# EAGLE board banana-split-panel (EAGLE 9.5.2), part 1 of 2
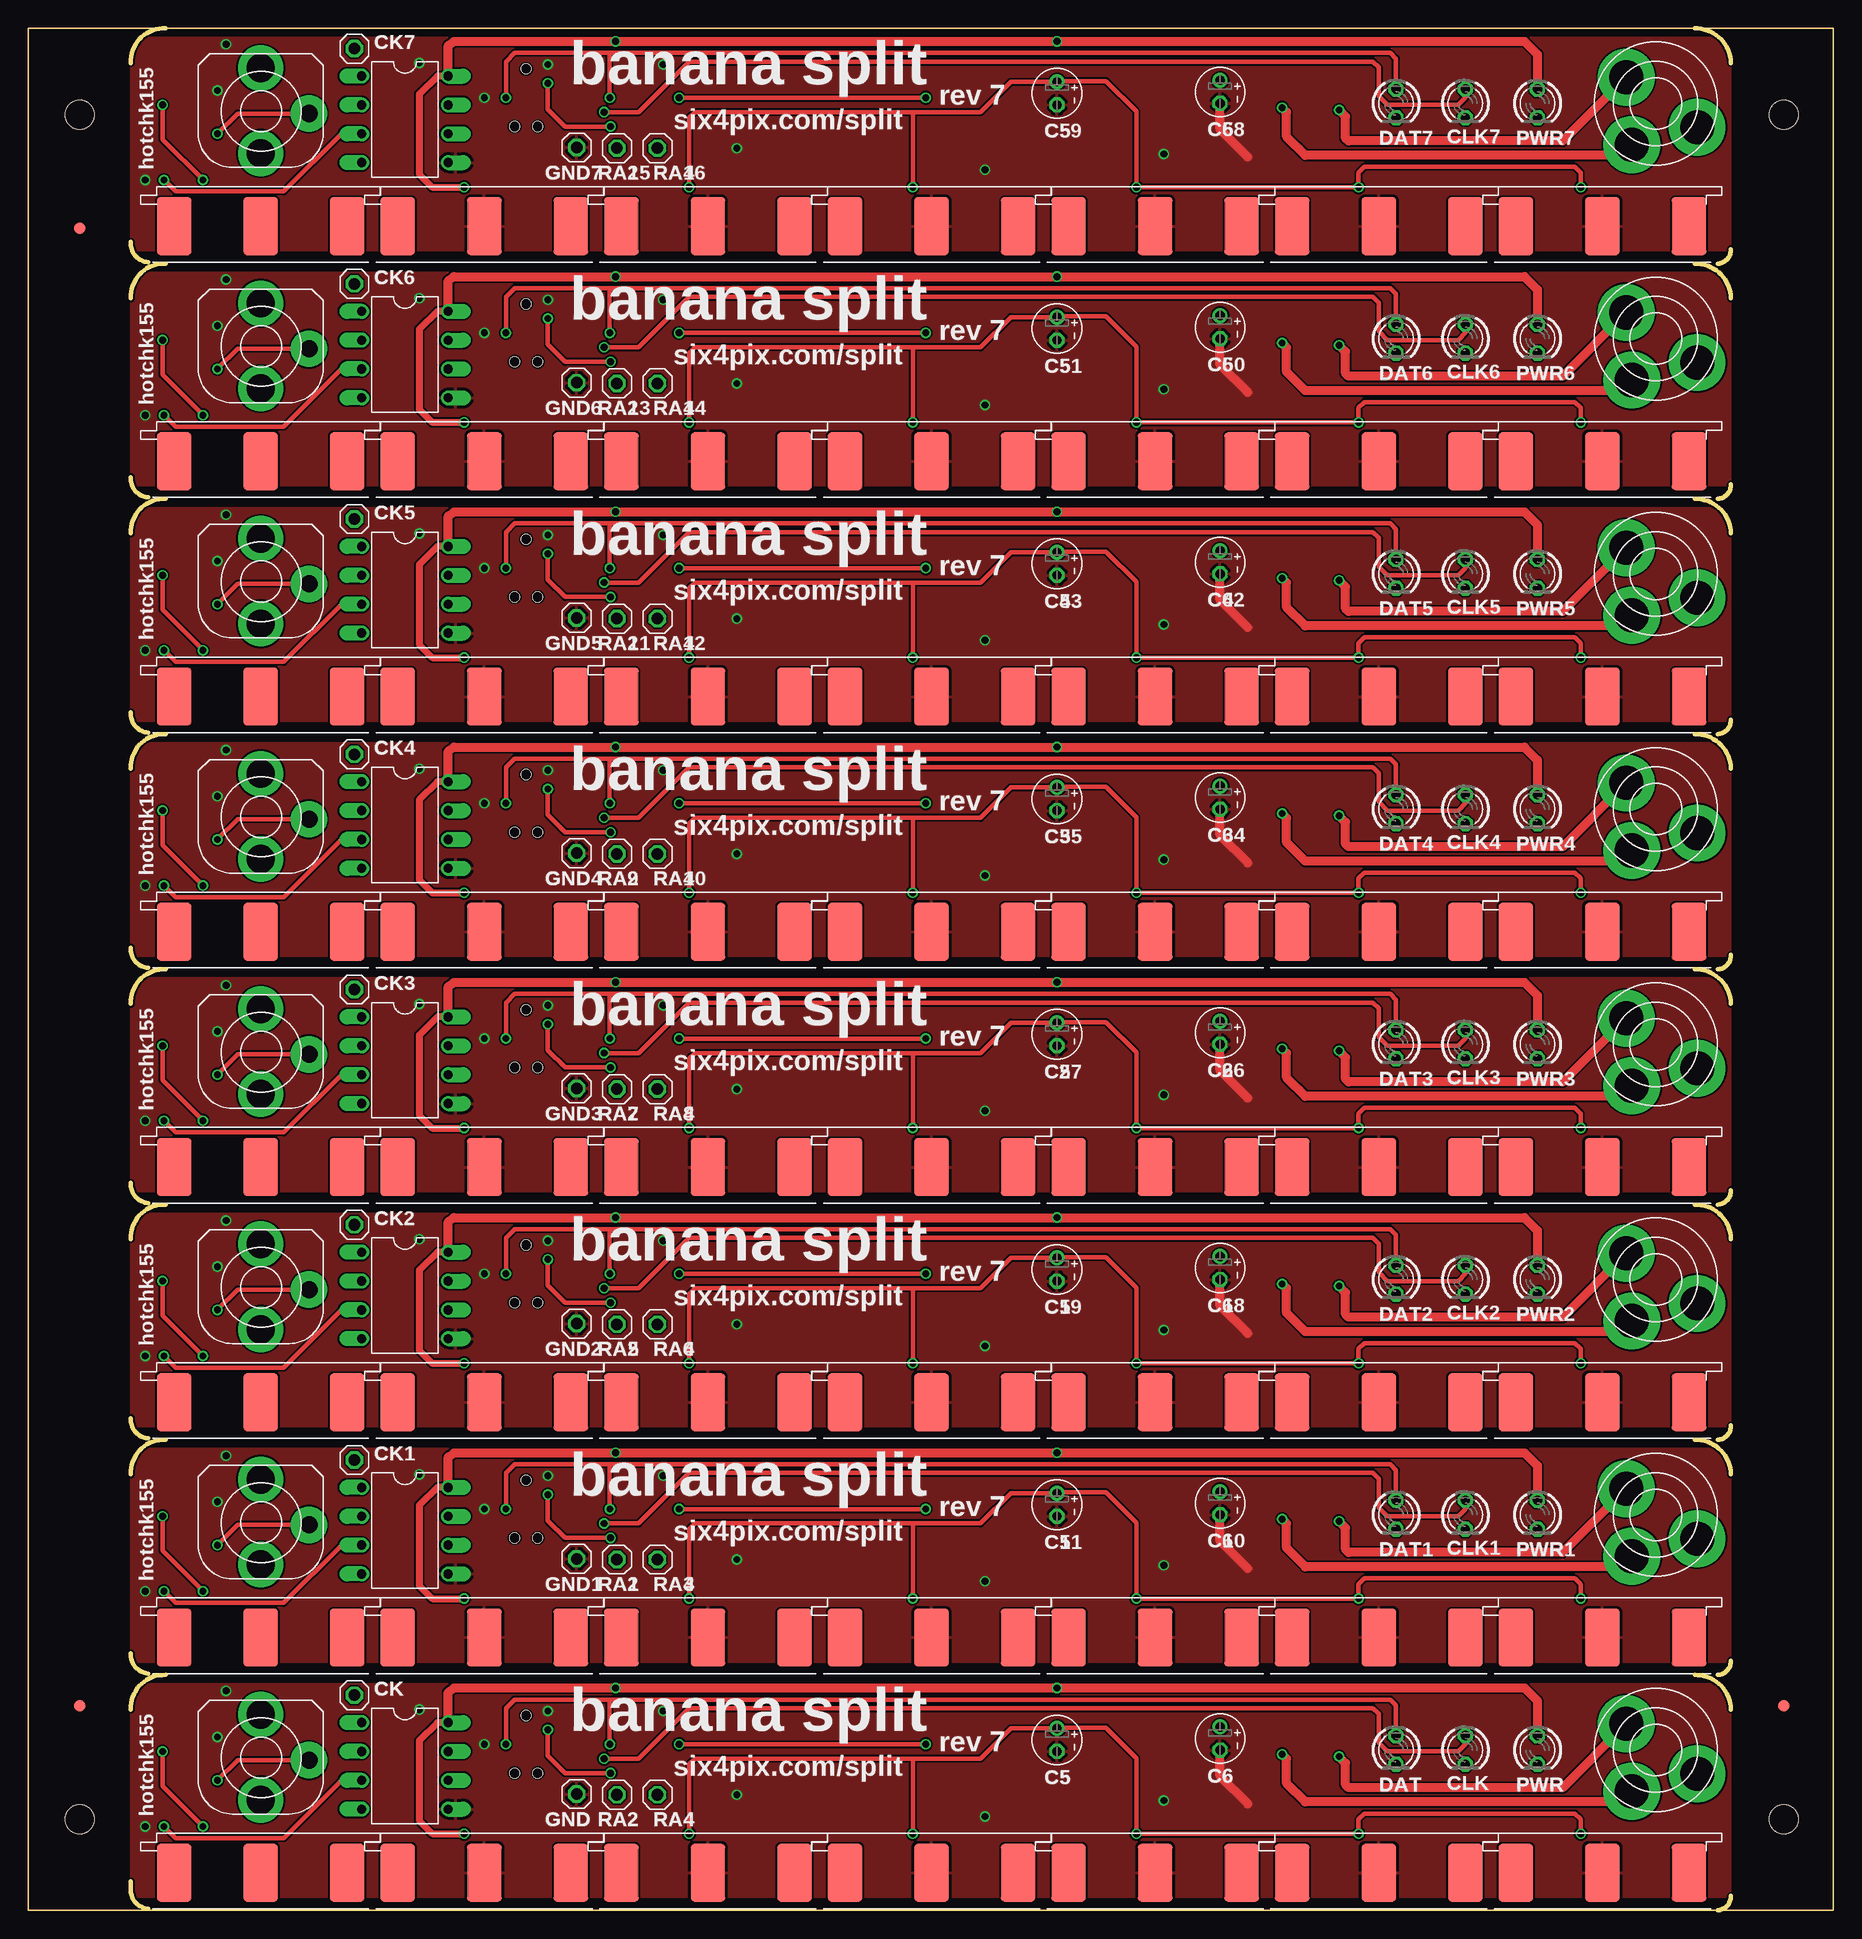
[diagram p0: board, top side]
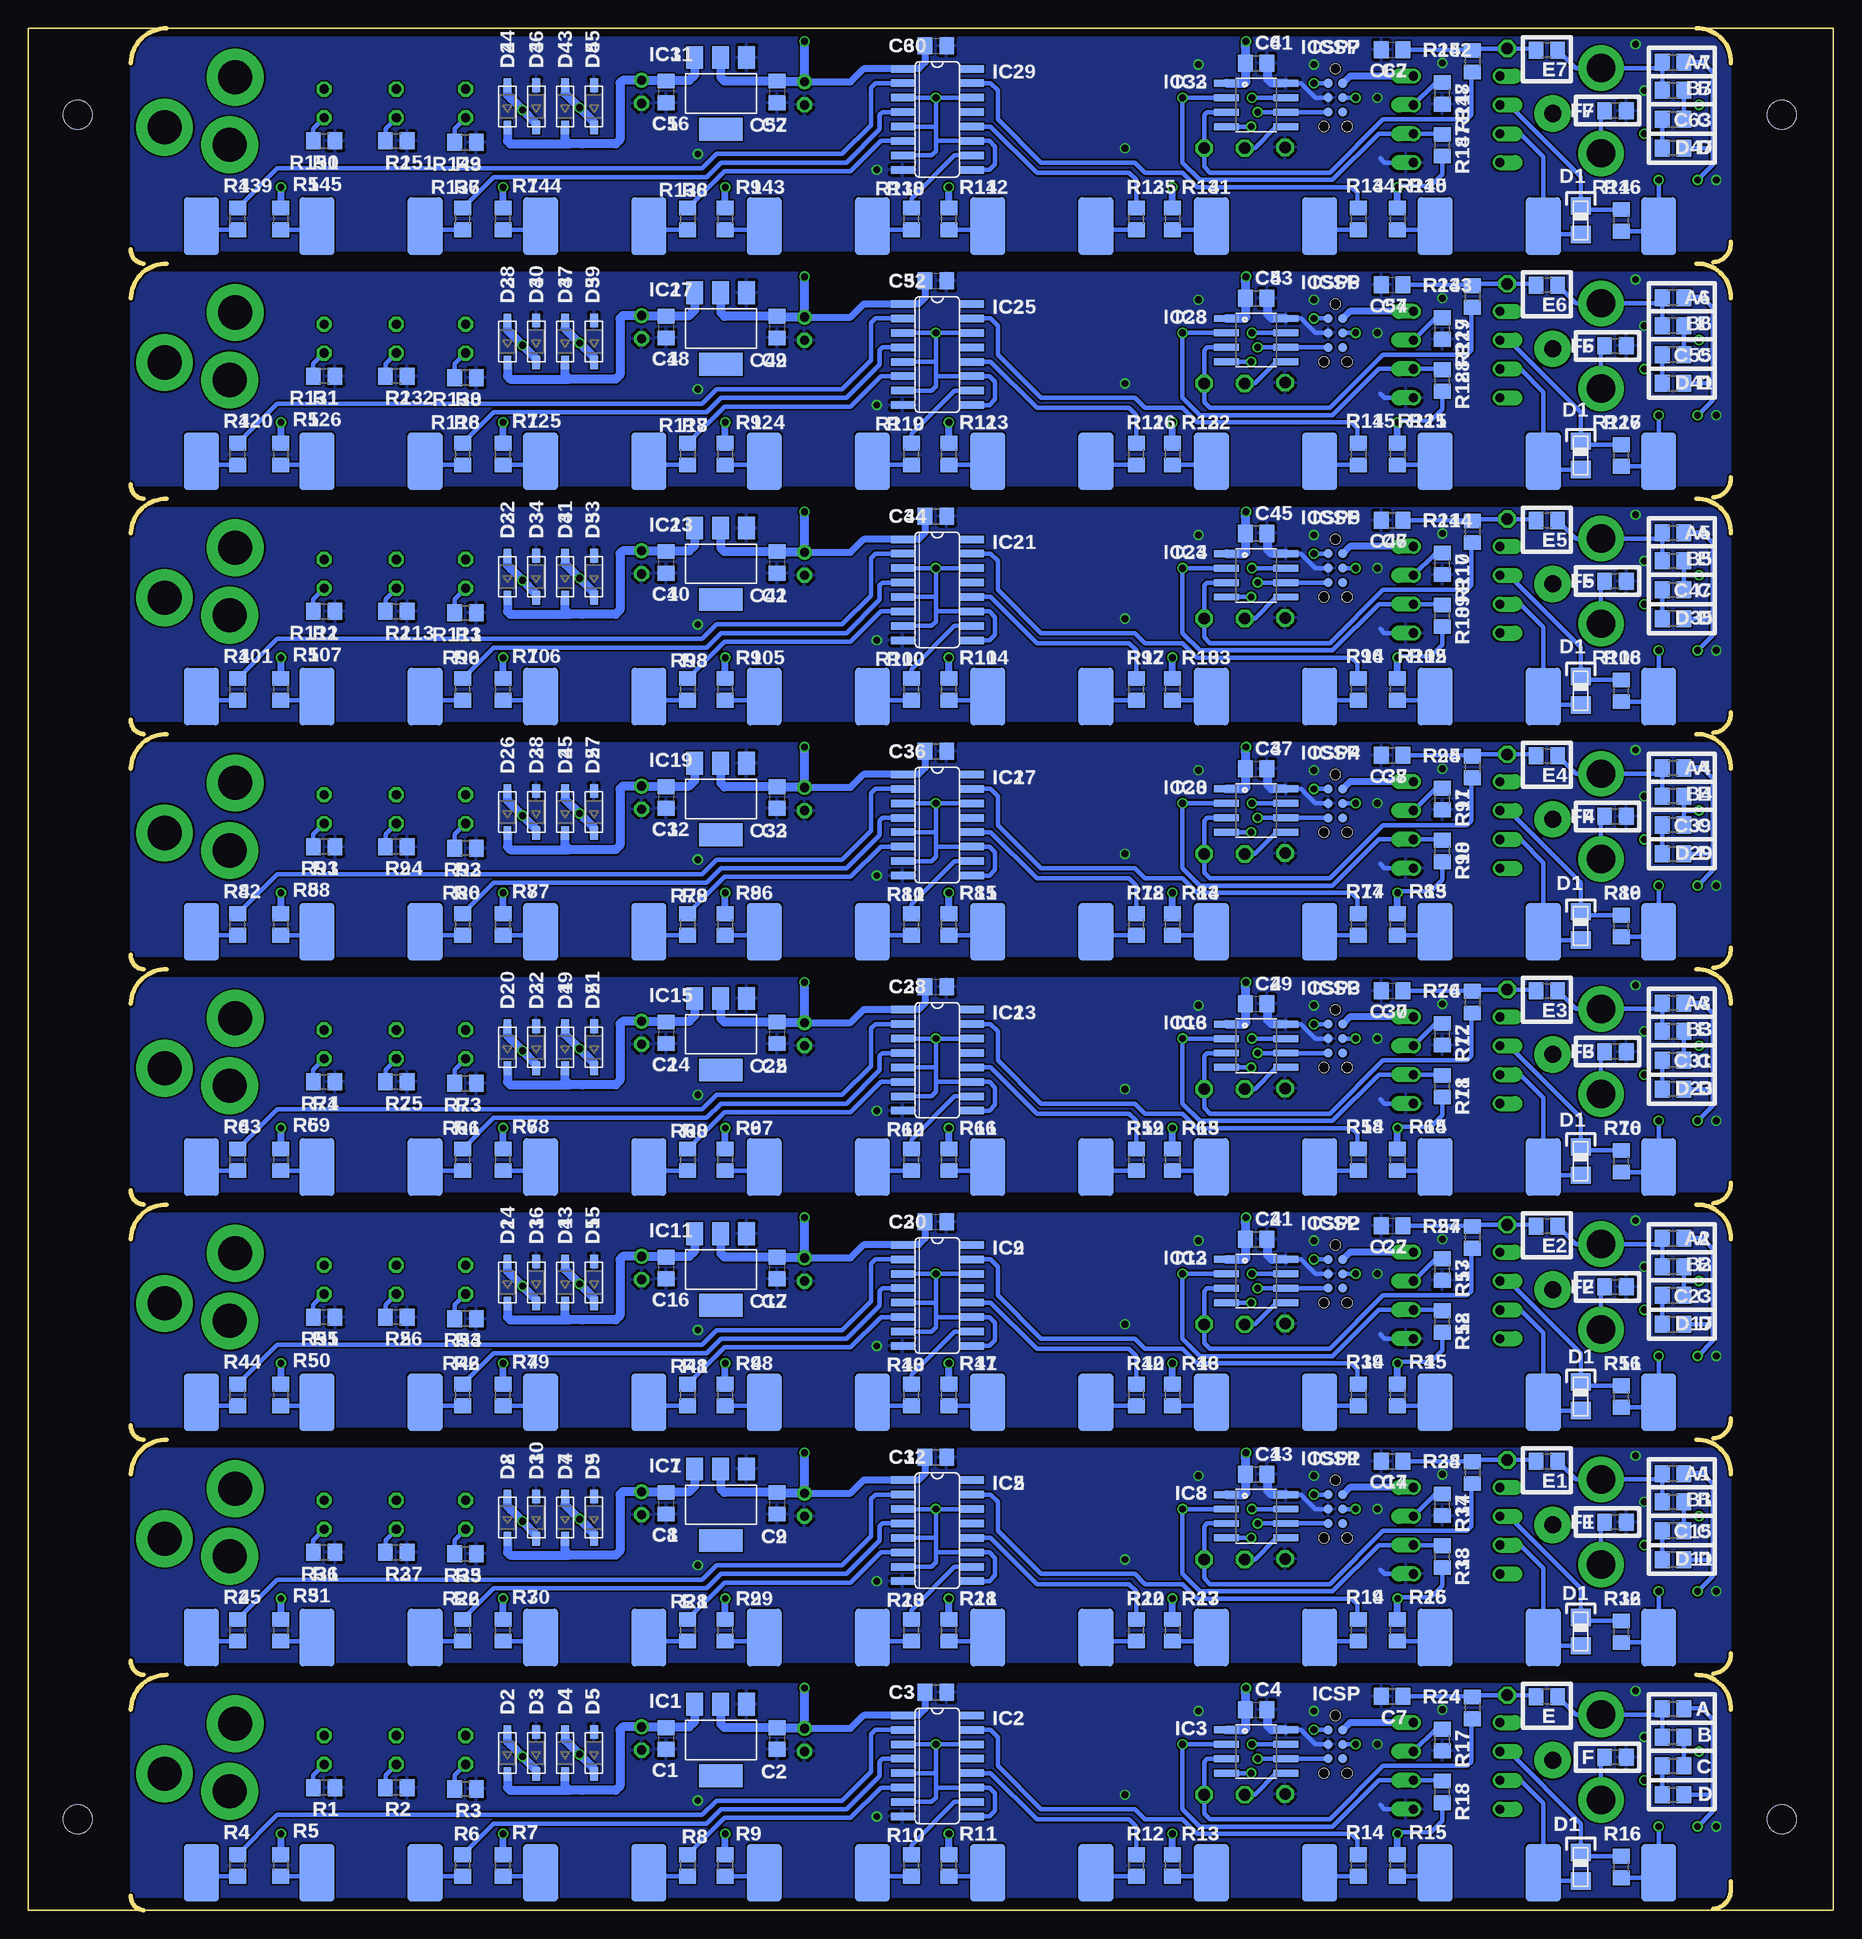
[diagram p1: board, bottom side, seen from below]

Size 158.88 x 165.61 mm. Coordinates in mm from the lower left corner, seen from the top.
Outline: 38 segments
Copper layers (1*16): Top 0.035mm / dielectric 1.5mm / Bottom 0.035mm
Design rules "hackvana": minimum track width 6mil, minimum drill 0.3mm, track to track 6mil, track to pad 9mil, pad to pad 6mil, via to via 6mil, smd to smd 0mil, copper to edge 6mil, drill to drill 6mil, minimum pad ring 10mil, minimum via ring 6mil, stop-mask expansion 2mil, vias tented up to drill 100mil, thermal gap 10mil
Holes 2.54 mm at 4.52,158 154.52,158 4.52,8 154.52,8

## Footprints (pad centres in the part's own frame; a part is rotated, then mirrored left to right if it is on the bottom)
R0805 = smd 1.3 x 1.5: 1 -0.95,0; 2 0.95,0
C0805 = smd 1.3 x 1.5: 1 -0.95,0; 2 0.95,0
E2-4 = drill 0.813 pad 1.27: + -1.016,0 | drill 0.813 pad 1.27 octagon: - 1.016,0
1X01 = drill 1.016 octagon: 1 0,0
LED3MM = drill 0.813 octagon: A -1.27,0; K 1.27,0
0805DIODE = smd 1.524 x 1.778: A -1.262,-0.005; C 1.238,-0.005
SOD-123 = smd 1.2 x 0.7: A 1.85,0; C -1.85,0
FIDUCIAL_1MM = smd 1 x 1: 1 0,0
SOT223 = smd 1.499 x 2.007: 1 -2.261,-3.15; 2 0.025,-3.15; 3 2.311,-3.15 | smd 3.81 x 2.007: 4 0,3.15
SO16 = smd 0.66 x 2.032: 1 -4.445,-3.073; 2 -3.175,-3.073; 3 -1.905,-3.073; 4 -0.635,-3.073; 5 0.635,-3.073; 6 1.905,-3.073; 7 3.175,-3.073; 8 4.445,-3.073; 9 4.445,3.073; 10 3.175,3.073; 11 1.905,3.073; 12 0.635,3.073; 13 -0.635,3.073; 14 -1.905,3.073; 15 -3.175,3.073; 16 -4.445,3.073
SO08 = smd 0.61 x 2.21: 1 -1.905,-2.616; 2 -0.635,-2.616; 3 0.635,-2.616; 4 1.905,-2.616; 5 1.905,2.616; 6 0.635,2.616; 7 -0.635,2.616; 8 -1.905,2.616
DIL08 = drill 0.813 offset: 1 -3.81,-3.81; 2 -1.27,-3.81; 3 1.27,-3.81; 4 3.81,-3.81; 5 3.81,3.81; 6 1.27,3.81; 7 -1.27,3.81; 8 -3.81,3.81
TC2030-MCP-NL = smd 0.787 x 0.787: 1 1.27,-0.635; 2 1.27,0.635; 3 2.54,-0.635; 4 2.54,0.635; 5 3.81,-0.635; 6 3.81,0.635 | hole 0.889: 0,0; 5.08,-1.016; 5.08,1.016
EDGEDIN = smd 3.048 x 5.08: 1 -7.62,-10.16; 2 0,-10.16; 3 7.62,-10.16 | smd 3.048 x 5.08 bottom: 4 -5.08,-10.16; 5 5.08,-10.16
PWR_SOCKET_2_1MM = drill 3 pad 5: BARREL 0,4.2; NC -4.2,0; PIN 3.4,-0.7
VERTICAL_3_5MM_SOCKET = drill 2.5 pad 4: 2 0,-3.75; 4 0,3.75 | drill 1.5 pad 3.2: 3 4.25,-0.25

## Placement (x,y rotation side)
A  1k8  [R0805]  14.1,17.72 180 bottom
A1  1k8  [R0805]  14.1,38.42 180 bottom
A2  1k8  [R0805]  14.1,59.12 180 bottom
A3  1k8  [R0805]  14.1,79.82 180 bottom
A4  1k8  [R0805]  14.1,100.52 180 bottom
A5  1k8  [R0805]  14.1,121.22 180 bottom
A6  1k8  [R0805]  14.1,141.92 180 bottom
A7  1k8  [R0805]  14.1,162.62 180 bottom
B  1k8  [R0805]  14.1,15.24 180 bottom
B1  1k8  [R0805]  14.1,35.94 180 bottom
B2  1k8  [R0805]  14.1,56.64 180 bottom
B3  1k8  [R0805]  14.1,77.34 180 bottom
B4  1k8  [R0805]  14.1,98.04 180 bottom
B5  1k8  [R0805]  14.1,118.75 180 bottom
B6  1k8  [R0805]  14.1,139.45 180 bottom
B7  1k8  [R0805]  14.1,160.15 180 bottom
C  1k8  [R0805]  14.1,12.7 180 bottom
C1  100n  [C0805]  102.74,15.11 270 bottom
C2  100n  [C0805]  92.96,15.11 270 bottom
C3  [C0805]  78.99,19.18 0 bottom
C4  100n  [C0805]  50.8,17.65 0 bottom
C5  4u7  [E2-4]  90.55,14.99 270 top
C6  4u7  [E2-4]  104.9,15.11 270 top
C7  100n  [C0805]  38.83,18.83 0 bottom
C8  100n  [C0805]  102.74,35.81 270 bottom
C9  100n  [C0805]  92.96,35.81 270 bottom
C10  4u7  [E2-4]  104.9,35.81 270 top
C11  4u7  [E2-4]  90.55,35.69 270 top
C12  [C0805]  78.99,39.88 0 bottom
C13  100n  [C0805]  50.8,38.35 0 bottom
C14  100n  [C0805]  38.83,39.53 0 bottom
C15  1k8  [R0805]  14.1,33.4 180 bottom
C16  100n  [C0805]  102.74,56.52 270 bottom
C17  100n  [C0805]  92.96,56.52 270 bottom
C18  4u7  [E2-4]  104.9,56.52 270 top
C19  4u7  [E2-4]  90.55,56.39 270 top
C20  [C0805]  78.99,60.58 0 bottom
C21  100n  [C0805]  50.8,59.05 0 bottom
C22  100n  [C0805]  38.83,60.23 0 bottom
C23  1k8  [R0805]  14.1,54.1 180 bottom
C24  100n  [C0805]  102.74,77.22 270 bottom
C25  100n  [C0805]  92.96,77.22 270 bottom
C26  4u7  [E2-4]  104.9,77.22 270 top
C27  4u7  [E2-4]  90.55,77.09 270 top
C28  [C0805]  78.99,81.28 0 bottom
C29  100n  [C0805]  50.8,79.76 0 bottom
C30  100n  [C0805]  38.83,80.93 0 bottom
C31  1k8  [R0805]  14.1,74.8 180 bottom
C32  100n  [C0805]  102.74,97.92 270 bottom
C33  100n  [C0805]  92.96,97.92 270 bottom
C34  4u7  [E2-4]  104.9,97.92 270 top
C35  4u7  [E2-4]  90.55,97.79 270 top
C36  [C0805]  78.99,101.98 0 bottom
C37  100n  [C0805]  50.8,100.46 0 bottom
C38  100n  [C0805]  38.83,101.63 0 bottom
C39  1k8  [R0805]  14.1,95.5 180 bottom
C40  100n  [C0805]  102.74,118.62 270 bottom
C41  100n  [C0805]  92.96,118.62 270 bottom
C42  4u7  [E2-4]  104.9,118.62 270 top
C43  4u7  [E2-4]  90.55,118.49 270 top
C44  [C0805]  78.99,122.68 0 bottom
C45  100n  [C0805]  50.8,121.16 0 bottom
C46  100n  [C0805]  38.83,122.33 0 bottom
C47  1k8  [R0805]  14.1,116.2 180 bottom
C48  100n  [C0805]  102.74,139.32 270 bottom
C49  100n  [C0805]  92.96,139.32 270 bottom
C50  4u7  [E2-4]  104.9,139.32 270 top
C51  4u7  [E2-4]  90.55,139.19 270 top
C52  [C0805]  78.99,143.38 0 bottom
C53  100n  [C0805]  50.8,141.86 0 bottom
C54  100n  [C0805]  38.83,143.03 0 bottom
C55  1k8  [R0805]  14.1,136.91 180 bottom
C56  100n  [C0805]  102.74,160.02 270 bottom
C57  100n  [C0805]  92.96,160.02 270 bottom
C58  4u7  [E2-4]  104.9,160.02 270 top
C59  4u7  [E2-4]  90.55,159.89 270 top
C60  [C0805]  78.99,164.08 0 bottom
C61  100n  [C0805]  50.8,162.56 0 bottom
C62  100n  [C0805]  38.83,163.73 0 bottom
C63  1k8  [R0805]  14.1,157.61 180 bottom
CK  [1X01]  28.7,18.92 0 top
CK1  [1X01]  28.7,39.62 0 top
CK2  [1X01]  28.7,60.33 0 top
CK3  [1X01]  28.7,81.03 0 top
CK4  [1X01]  28.7,101.73 0 top
CK5  [1X01]  28.7,122.43 0 top
CK6  [1X01]  28.7,143.13 0 top
CK7  [1X01]  28.7,163.83 0 top
CLK  [LED3MM]  126.49,14.1 270 top
CLK1  [LED3MM]  126.49,34.8 270 top
CLK2  [LED3MM]  126.49,55.5 270 top
CLK3  [LED3MM]  126.49,76.2 270 top
CLK4  [LED3MM]  126.49,96.9 270 top
CLK5  [LED3MM]  126.49,117.6 270 top
CLK6  [LED3MM]  126.49,138.3 270 top
CLK7  [LED3MM]  126.49,159 270 top
D  1k8  [R0805]  14.1,10.16 180 bottom
D1  0805DIODE  [0805DIODE]  22.23,3.81 270 bottom
D2  [SOD-123]  116.71,13.84 90 bottom
D3  [SOD-123]  114.17,13.84 90 bottom
D4  [SOD-123]  111.63,13.84 90 bottom
D5  [SOD-123]  109.09,13.84 90 bottom
D6  0805DIODE  [0805DIODE]  22.23,24.51 270 bottom
D7  [SOD-123]  111.63,34.54 90 bottom
D8  [SOD-123]  116.71,34.54 90 bottom
D9  [SOD-123]  109.09,34.54 90 bottom
D10  [SOD-123]  114.17,34.54 90 bottom
D11  1k8  [R0805]  14.1,30.86 180 bottom
D12  0805DIODE  [0805DIODE]  22.23,45.21 270 bottom
D13  [SOD-123]  111.63,55.24 90 bottom
D14  [SOD-123]  116.71,55.24 90 bottom
D15  [SOD-123]  109.09,55.24 90 bottom
D16  [SOD-123]  114.17,55.24 90 bottom
D17  1k8  [R0805]  14.1,51.56 180 bottom
D18  0805DIODE  [0805DIODE]  22.23,65.91 270 bottom
D19  [SOD-123]  111.63,75.95 90 bottom
D20  [SOD-123]  116.71,75.95 90 bottom
D21  [SOD-123]  109.09,75.95 90 bottom
D22  [SOD-123]  114.17,75.95 90 bottom
D23  1k8  [R0805]  14.1,72.26 180 bottom
D24  0805DIODE  [0805DIODE]  22.23,86.61 270 bottom
D25  [SOD-123]  111.63,96.65 90 bottom
D26  [SOD-123]  116.71,96.65 90 bottom
D27  [SOD-123]  109.09,96.65 90 bottom
D28  [SOD-123]  114.17,96.65 90 bottom
D29  1k8  [R0805]  14.1,92.96 180 bottom
D30  0805DIODE  [0805DIODE]  22.23,107.31 270 bottom
D31  [SOD-123]  111.63,117.35 90 bottom
D32  [SOD-123]  116.71,117.35 90 bottom
D33  [SOD-123]  109.09,117.35 90 bottom
D34  [SOD-123]  114.17,117.35 90 bottom
D35  1k8  [R0805]  14.1,113.67 180 bottom
D36  0805DIODE  [0805DIODE]  22.23,128.02 270 bottom
D37  [SOD-123]  111.63,138.05 90 bottom
D38  [SOD-123]  116.71,138.05 90 bottom
D39  [SOD-123]  109.09,138.05 90 bottom
D40  [SOD-123]  114.17,138.05 90 bottom
D41  1k8  [R0805]  14.1,134.37 180 bottom
D42  0805DIODE  [0805DIODE]  22.23,148.72 270 bottom
D43  [SOD-123]  111.63,158.75 90 bottom
D44  [SOD-123]  116.71,158.75 90 bottom
D45  [SOD-123]  109.09,158.75 90 bottom
D46  [SOD-123]  114.17,158.75 90 bottom
D47  1k8  [R0805]  14.1,155.07 180 bottom
DAT  [LED3MM]  120.4,14.1 270 top
DAT1  [LED3MM]  120.4,34.8 270 top
DAT2  [LED3MM]  120.4,55.5 270 top
DAT3  [LED3MM]  120.4,76.2 270 top
DAT4  [LED3MM]  120.4,96.9 270 top
DAT5  [LED3MM]  120.4,117.6 270 top
DAT6  [LED3MM]  120.4,138.3 270 top
DAT7  [LED3MM]  120.4,159 270 top
E  1k8  [R0805]  25.21,18.8 0 bottom
E1  1k8  [R0805]  25.21,39.5 0 bottom
E2  1k8  [R0805]  25.21,60.2 0 bottom
E3  1k8  [R0805]  25.21,80.9 0 bottom
E4  1k8  [R0805]  25.21,101.6 0 bottom
E5  1k8  [R0805]  25.21,122.3 0 bottom
E6  1k8  [R0805]  25.21,143 0 bottom
E7  1k8  [R0805]  25.21,163.7 0 bottom
E$1  [FIDUCIAL_1MM]  4.52,18 0 top
E$2  [FIDUCIAL_1MM]  154.52,18 0 top
E$3  [FIDUCIAL_1MM]  4.52,148 0 top
F  1k8  [R0805]  19.18,13.46 180 bottom
F1  1k8  [R0805]  19.18,34.16 180 bottom
F2  1k8  [R0805]  19.18,54.86 180 bottom
F3  1k8  [R0805]  19.18,75.56 180 bottom
F4  1k8  [R0805]  19.18,96.27 180 bottom
F5  1k8  [R0805]  19.18,116.97 180 bottom
F6  1k8  [R0805]  19.18,137.67 180 bottom
F7  1k8  [R0805]  19.18,158.37 180 bottom
GND  [1X01]  48.26,10.22 0 top
GND1  [1X01]  48.26,30.92 0 top
GND2  [1X01]  48.26,51.63 0 top
GND3  [1X01]  48.26,72.33 0 top
GND4  [1X01]  48.26,93.03 0 top
GND5  [1X01]  48.26,113.73 0 top
GND6  [1X01]  48.26,134.43 0 top
GND7  [1X01]  48.26,155.13 0 top
IC1  REG1117  [SOT223]  97.92,14.99 180 bottom
IC2  4050D  [SO16]  78.87,12.7 270 bottom
IC3  PIC12F1822SO08  [SO08]  50.8,13.97 270 bottom
IC4  6N138  [DIL08]  33.15,12.7 270 top
IC5  4050D  [SO16]  78.87,33.4 270 bottom
IC6  6N138  [DIL08]  33.15,33.4 270 top
IC7  REG1117  [SOT223]  97.92,35.69 180 bottom
IC8  PIC12F1822SO08  [SO08]  50.8,34.67 270 bottom
IC9  4050D  [SO16]  78.87,54.1 270 bottom
IC10  6N138  [DIL08]  33.15,54.1 270 top
IC11  REG1117  [SOT223]  97.92,56.39 180 bottom
IC12  PIC12F1822SO08  [SO08]  50.8,55.37 270 bottom
IC13  4050D  [SO16]  78.87,74.8 270 bottom
IC14  6N138  [DIL08]  33.15,74.8 270 top
IC15  REG1117  [SOT223]  97.92,77.09 180 bottom
IC16  PIC12F1822SO08  [SO08]  50.8,76.07 270 bottom
IC17  4050D  [SO16]  78.87,95.5 270 bottom
IC18  6N138  [DIL08]  33.15,95.5 270 top
IC19  REG1117  [SOT223]  97.92,97.79 180 bottom
IC20  PIC12F1822SO08  [SO08]  50.8,96.77 270 bottom
IC21  4050D  [SO16]  78.87,116.2 270 bottom
IC22  6N138  [DIL08]  33.15,116.2 270 top
IC23  REG1117  [SOT223]  97.92,118.49 180 bottom
IC24  PIC12F1822SO08  [SO08]  50.8,117.47 270 bottom
IC25  4050D  [SO16]  78.87,136.91 270 bottom
IC26  6N138  [DIL08]  33.15,136.91 270 top
IC27  REG1117  [SOT223]  97.92,139.19 180 bottom
IC28  PIC12F1822SO08  [SO08]  50.8,138.18 270 bottom
IC29  4050D  [SO16]  78.87,157.61 270 bottom
IC30  6N138  [DIL08]  33.15,157.61 270 top
IC31  REG1117  [SOT223]  97.92,159.89 180 bottom
IC32  PIC12F1822SO08  [SO08]  50.8,158.88 270 bottom
ICSP  [TC2030-MCP-NL]  43.81,17.14 270 bottom
ICSP1  [TC2030-MCP-NL]  43.81,37.85 270 bottom
ICSP2  [TC2030-MCP-NL]  43.81,58.55 270 bottom
ICSP3  [TC2030-MCP-NL]  43.81,79.25 270 bottom
ICSP4  [TC2030-MCP-NL]  43.81,99.95 270 bottom
ICSP5  [TC2030-MCP-NL]  43.81,120.65 270 bottom
ICSP6  [TC2030-MCP-NL]  43.81,141.35 270 bottom
ICSP7  [TC2030-MCP-NL]  43.81,162.05 270 bottom
IN  DIN5PIN  [EDGEDIN]  20.45,13.46 0 top
IN1  DIN5PIN  [EDGEDIN]  20.45,34.16 0 top
IN2  DIN5PIN  [EDGEDIN]  20.45,54.86 0 top
IN3  DIN5PIN  [EDGEDIN]  20.45,75.56 0 top
IN4  DIN5PIN  [EDGEDIN]  20.45,96.27 0 top
IN5  DIN5PIN  [EDGEDIN]  20.45,116.97 0 top
IN6  DIN5PIN  [EDGEDIN]  20.45,137.67 0 top
IN7  DIN5PIN  [EDGEDIN]  20.45,158.37 0 top
PWR  [LED3MM]  132.84,14.1 270 top
PWR1  [LED3MM]  132.84,34.8 270 top
PWR2  [LED3MM]  132.84,55.5 270 top
PWR3  [LED3MM]  132.84,76.2 270 top
PWR4  [LED3MM]  132.84,96.9 270 top
PWR5  [LED3MM]  132.84,117.6 270 top
PWR6  [LED3MM]  132.84,138.3 270 top
PWR7  [LED3MM]  132.84,159 270 top
R1  1k  [R0805]  132.84,10.79 180 bottom
R2  220r  [R0805]  126.49,10.79 180 bottom
R3  220r  [R0805]  120.4,10.67 180 bottom
R4  220r  [R0805]  140.46,3.94 270 bottom
R5  220r  [R0805]  136.65,3.94 90 bottom
R6  220r  [R0805]  120.65,3.94 270 bottom
R7  220r  [R0805]  117.09,3.94 90 bottom
R8  220r  [R0805]  100.84,3.94 270 bottom
R9  220r  [R0805]  97.54,3.94 90 bottom
R10  220r  [R0805]  81.15,3.94 270 bottom
R11  220r  [R0805]  77.85,3.94 90 bottom
R12  220r  [R0805]  61.34,3.94 270 bottom
R13  220r  [R0805]  58.17,3.94 90 bottom
R14  220r  [R0805]  41.78,3.94 270 bottom
R15  220r  [R0805]  38.35,3.94 90 bottom
R16  220r  [R0805]  18.67,3.81 90 bottom
R17  1k8  [R0805]  34.42,14.99 90 bottom
R18  1k8  [R0805]  34.42,10.41 90 bottom
R19  220r  [R0805]  41.78,24.64 270 bottom
R20  220r  [R0805]  61.34,24.64 270 bottom
R21  220r  [R0805]  100.84,24.64 270 bottom
R22  220r  [R0805]  120.65,24.64 270 bottom
R23  220r  [R0805]  81.15,24.64 270 bottom
R24  1k8  [R0805]  31.75,17.81 90 bottom
R25  220r  [R0805]  140.46,24.64 270 bottom
R26  220r  [R0805]  38.35,24.64 90 bottom
R27  220r  [R0805]  58.17,24.64 90 bottom
R28  220r  [R0805]  77.85,24.64 90 bottom
R29  220r  [R0805]  97.54,24.64 90 bottom
R30  220r  [R0805]  117.09,24.64 90 bottom
R31  220r  [R0805]  136.65,24.64 90 bottom
R32  220r  [R0805]  18.67,24.51 90 bottom
R33  1k8  [R0805]  34.42,31.11 90 bottom
R34  1k8  [R0805]  34.42,35.69 90 bottom
R35  220r  [R0805]  120.4,31.37 180 bottom
R36  1k  [R0805]  132.84,31.5 180 bottom
R37  220r  [R0805]  126.49,31.5 180 bottom
R38  1k8  [R0805]  31.75,38.51 90 bottom
R39  220r  [R0805]  41.78,45.34 270 bottom
R40  220r  [R0805]  61.34,45.34 270 bottom
R41  220r  [R0805]  100.84,45.34 270 bottom
R42  220r  [R0805]  120.65,45.34 270 bottom
R43  220r  [R0805]  81.15,45.34 270 bottom
R44  220r  [R0805]  140.46,45.34 270 bottom
R45  220r  [R0805]  38.35,45.34 90 bottom
R46  220r  [R0805]  58.17,45.34 90 bottom
R47  220r  [R0805]  77.85,45.34 90 bottom
R48  220r  [R0805]  97.54,45.34 90 bottom
R49  220r  [R0805]  117.09,45.34 90 bottom
R50  220r  [R0805]  136.65,45.34 90 bottom
R51  220r  [R0805]  18.67,45.21 90 bottom
R52  1k8  [R0805]  34.42,51.82 90 bottom
R53  1k8  [R0805]  34.42,56.39 90 bottom
R54  220r  [R0805]  120.4,52.07 180 bottom
R55  1k  [R0805]  132.84,52.2 180 bottom
R56  220r  [R0805]  126.49,52.2 180 bottom
R57  1k8  [R0805]  31.75,59.21 90 bottom
R58  220r  [R0805]  41.78,66.04 270 bottom
R59  220r  [R0805]  61.34,66.04 270 bottom
R60  220r  [R0805]  100.84,66.04 270 bottom
R61  220r  [R0805]  120.65,66.04 270 bottom
R62  220r  [R0805]  81.15,66.04 270 bottom
R63  220r  [R0805]  140.46,66.04 270 bottom
R64  220r  [R0805]  38.35,66.04 90 bottom
R65  220r  [R0805]  58.17,66.04 90 bottom
R66  220r  [R0805]  77.85,66.04 90 bottom
R67  220r  [R0805]  97.54,66.04 90 bottom
R68  220r  [R0805]  117.09,66.04 90 bottom
R69  220r  [R0805]  136.65,66.04 90 bottom
R70  220r  [R0805]  18.67,65.91 90 bottom
R71  1k8  [R0805]  34.42,72.52 90 bottom
R72  1k8  [R0805]  34.42,77.09 90 bottom
R73  220r  [R0805]  120.4,72.77 180 bottom
R74  1k  [R0805]  132.84,72.9 180 bottom
R75  220r  [R0805]  126.49,72.9 180 bottom
R76  1k8  [R0805]  31.75,79.91 90 bottom
R77  220r  [R0805]  41.78,86.74 270 bottom
R78  220r  [R0805]  61.34,86.74 270 bottom
R79  220r  [R0805]  100.84,86.74 270 bottom
R80  220r  [R0805]  120.65,86.74 270 bottom
R81  220r  [R0805]  81.15,86.74 270 bottom
R82  220r  [R0805]  140.46,86.74 270 bottom
R83  220r  [R0805]  38.35,86.74 90 bottom
R84  220r  [R0805]  58.17,86.74 90 bottom
R85  220r  [R0805]  77.85,86.74 90 bottom
R86  220r  [R0805]  97.54,86.74 90 bottom
R87  220r  [R0805]  117.09,86.74 90 bottom
R88  220r  [R0805]  136.65,86.74 90 bottom
R89  220r  [R0805]  18.67,86.61 90 bottom
R90  1k8  [R0805]  34.42,93.22 90 bottom
R91  1k8  [R0805]  34.42,97.79 90 bottom
R92  220r  [R0805]  120.4,93.47 180 bottom
R93  1k  [R0805]  132.84,93.6 180 bottom
R94  220r  [R0805]  126.49,93.6 180 bottom
R95  1k8  [R0805]  31.75,100.62 90 bottom
R96  220r  [R0805]  41.78,107.44 270 bottom
R97  220r  [R0805]  61.34,107.44 270 bottom
R98  220r  [R0805]  100.84,107.44 270 bottom
R99  220r  [R0805]  120.65,107.44 270 bottom
R100  220r  [R0805]  81.15,107.44 270 bottom
R101  220r  [R0805]  140.46,107.44 270 bottom
R102  220r  [R0805]  38.35,107.44 90 bottom
R103  220r  [R0805]  58.17,107.44 90 bottom
R104  220r  [R0805]  77.85,107.44 90 bottom
R105  220r  [R0805]  97.54,107.44 90 bottom
R106  220r  [R0805]  117.09,107.44 90 bottom
R107  220r  [R0805]  136.65,107.44 90 bottom
R108  220r  [R0805]  18.67,107.31 90 bottom
R109  1k8  [R0805]  34.42,113.92 90 bottom
R110  1k8  [R0805]  34.42,118.49 90 bottom
R111  220r  [R0805]  120.4,114.17 180 bottom
R112  1k  [R0805]  132.84,114.3 180 bottom
R113  220r  [R0805]  126.49,114.3 180 bottom
R114  1k8  [R0805]  31.75,121.32 90 bottom
R115  220r  [R0805]  41.78,128.14 270 bottom
R116  220r  [R0805]  61.34,128.14 270 bottom
R117  220r  [R0805]  100.84,128.14 270 bottom
R118  220r  [R0805]  120.65,128.14 270 bottom
R119  220r  [R0805]  81.15,128.14 270 bottom
R120  220r  [R0805]  140.46,128.14 270 bottom
R121  220r  [R0805]  38.35,128.14 90 bottom
R122  220r  [R0805]  58.17,128.14 90 bottom
R123  220r  [R0805]  77.85,128.14 90 bottom
R124  220r  [R0805]  97.54,128.14 90 bottom
R125  220r  [R0805]  117.09,128.14 90 bottom
R126  220r  [R0805]  136.65,128.14 90 bottom
R127  220r  [R0805]  18.67,128.02 90 bottom
R128  1k8  [R0805]  34.42,134.62 90 bottom
R129  1k8  [R0805]  34.42,139.19 90 bottom
R130  220r  [R0805]  120.4,134.87 180 bottom
R131  1k  [R0805]  132.84,135 180 bottom
R132  220r  [R0805]  126.49,135 180 bottom
R133  1k8  [R0805]  31.75,142.02 90 bottom
R134  220r  [R0805]  41.78,148.84 270 bottom
R135  220r  [R0805]  61.34,148.84 270 bottom
R136  220r  [R0805]  100.84,148.84 270 bottom
R137  220r  [R0805]  120.65,148.84 270 bottom
R138  220r  [R0805]  81.15,148.84 270 bottom
R139  220r  [R0805]  140.46,148.84 270 bottom
R140  220r  [R0805]  38.35,148.84 90 bottom
R141  220r  [R0805]  58.17,148.84 90 bottom
R142  220r  [R0805]  77.85,148.84 90 bottom
R143  220r  [R0805]  97.54,148.84 90 bottom
R144  220r  [R0805]  117.09,148.84 90 bottom
R145  220r  [R0805]  136.65,148.84 90 bottom
R146  220r  [R0805]  18.67,148.72 90 bottom
R147  1k8  [R0805]  34.42,155.32 90 bottom
R148  1k8  [R0805]  34.42,159.89 90 bottom
R149  220r  [R0805]  120.4,155.57 180 bottom
R150  1k  [R0805]  132.84,155.7 180 bottom
R151  220r  [R0805]  126.49,155.7 180 bottom
R152  1k8  [R0805]  31.75,162.72 90 bottom
RA1  [1X01]  51.82,30.86 0 top
RA2  [1X01]  51.82,10.16 0 top
RA3  [1X01]  55.37,30.86 0 top
RA4  [1X01]  55.37,10.16 0 top
RA5  [1X01]  51.82,51.56 0 top
RA6  [1X01]  55.37,51.56 0 top
RA7  [1X01]  51.82,72.26 0 top
RA8  [1X01]  55.37,72.26 0 top
RA9  [1X01]  51.82,92.96 0 top
RA10  [1X01]  55.37,92.96 0 top
RA11  [1X01]  51.82,113.67 0 top
RA12  [1X01]  55.37,113.67 0 top
RA13  [1X01]  51.82,134.37 0 top
RA14  [1X01]  55.37,134.37 0 top
RA15  [1X01]  51.82,155.07 0 top
RA16  [1X01]  55.37,155.07 0 top
U$1  PWR_SOCKET_2_1MM  [PWR_SOCKET_2_1MM]  143.26,14.1 150 top
U$2  PWR_SOCKET_2_1MM  [PWR_SOCKET_2_1MM]  143.26,34.8 150 top
U$3  PWR_SOCKET_2_1MM  [PWR_SOCKET_2_1MM]  143.26,55.5 150 top
U$4  PWR_SOCKET_2_1MM  [PWR_SOCKET_2_1MM]  143.26,76.2 150 top
U$5  PWR_SOCKET_2_1MM  [PWR_SOCKET_2_1MM]  143.26,96.9 150 top
U$6  PWR_SOCKET_2_1MM  [PWR_SOCKET_2_1MM]  143.26,117.6 150 top
U$7  PWR_SOCKET_2_1MM  [PWR_SOCKET_2_1MM]  143.26,138.3 150 top
U$8  PWR_SOCKET_2_1MM  [PWR_SOCKET_2_1MM]  143.26,159 150 top
X1  DIN5PIN  [EDGEDIN]  40.13,13.46 0 top
X2  DIN5PIN  [EDGEDIN]  59.82,13.46 0 top
X3  DIN5PIN  [EDGEDIN]  79.5,13.46 0 top
X4  DIN5PIN  [EDGEDIN]  99.19,13.46 0 top
X5  DIN5PIN  [EDGEDIN]  118.87,13.46 0 top
X6  DIN5PIN  [EDGEDIN]  138.56,13.46 0 top
X7  VERTICAL_3_5MM_SOCKET  [VERTICAL_3_5MM_SOCKET]  20.45,13.46 0 top
X8  DIN5PIN  [EDGEDIN]  40.13,34.16 0 top
X9  DIN5PIN  [EDGEDIN]  59.82,34.16 0 top
X10  DIN5PIN  [EDGEDIN]  79.5,34.16 0 top
X11  DIN5PIN  [EDGEDIN]  99.19,34.16 0 top
X12  DIN5PIN  [EDGEDIN]  118.87,34.16 0 top
X13  DIN5PIN  [EDGEDIN]  138.56,34.16 0 top
X14  VERTICAL_3_5MM_SOCKET  [VERTICAL_3_5MM_SOCKET]  20.45,34.16 0 top
X15  DIN5PIN  [EDGEDIN]  40.13,54.86 0 top
X16  DIN5PIN  [EDGEDIN]  59.82,54.86 0 top
X17  DIN5PIN  [EDGEDIN]  79.5,54.86 0 top
X18  DIN5PIN  [EDGEDIN]  99.19,54.86 0 top
X19  DIN5PIN  [EDGEDIN]  118.87,54.86 0 top
X20  DIN5PIN  [EDGEDIN]  138.56,54.86 0 top
X21  VERTICAL_3_5MM_SOCKET  [VERTICAL_3_5MM_SOCKET]  20.45,54.86 0 top
X22  DIN5PIN  [EDGEDIN]  40.13,75.56 0 top
X23  DIN5PIN  [EDGEDIN]  59.82,75.56 0 top
X24  DIN5PIN  [EDGEDIN]  79.5,75.56 0 top
X25  DIN5PIN  [EDGEDIN]  99.19,75.56 0 top
X26  DIN5PIN  [EDGEDIN]  118.87,75.56 0 top
X27  DIN5PIN  [EDGEDIN]  138.56,75.56 0 top
X28  VERTICAL_3_5MM_SOCKET  [VERTICAL_3_5MM_SOCKET]  20.45,75.56 0 top
X29  DIN5PIN  [EDGEDIN]  40.13,96.27 0 top
X30  DIN5PIN  [EDGEDIN]  59.82,96.27 0 top
X31  DIN5PIN  [EDGEDIN]  79.5,96.27 0 top
X32  DIN5PIN  [EDGEDIN]  99.19,96.27 0 top
X33  DIN5PIN  [EDGEDIN]  118.87,96.27 0 top
X34  DIN5PIN  [EDGEDIN]  138.56,96.27 0 top
X35  VERTICAL_3_5MM_SOCKET  [VERTICAL_3_5MM_SOCKET]  20.45,96.27 0 top
X36  DIN5PIN  [EDGEDIN]  40.13,116.97 0 top
X37  DIN5PIN  [EDGEDIN]  59.82,116.97 0 top
X38  DIN5PIN  [EDGEDIN]  79.5,116.97 0 top
X39  DIN5PIN  [EDGEDIN]  99.19,116.97 0 top
X40  DIN5PIN  [EDGEDIN]  118.87,116.97 0 top
X41  DIN5PIN  [EDGEDIN]  138.56,116.97 0 top
X42  VERTICAL_3_5MM_SOCKET  [VERTICAL_3_5MM_SOCKET]  20.45,116.97 0 top
X43  DIN5PIN  [EDGEDIN]  40.13,137.67 0 top
X44  DIN5PIN  [EDGEDIN]  59.82,137.67 0 top
X45  DIN5PIN  [EDGEDIN]  79.5,137.67 0 top
X46  DIN5PIN  [EDGEDIN]  99.19,137.67 0 top
X47  DIN5PIN  [EDGEDIN]  118.87,137.67 0 top
X48  DIN5PIN  [EDGEDIN]  138.56,137.67 0 top
X49  VERTICAL_3_5MM_SOCKET  [VERTICAL_3_5MM_SOCKET]  20.45,137.67 0 top
X50  DIN5PIN  [EDGEDIN]  40.13,158.37 0 top
X51  DIN5PIN  [EDGEDIN]  59.82,158.37 0 top
X52  DIN5PIN  [EDGEDIN]  79.5,158.37 0 top
X53  DIN5PIN  [EDGEDIN]  99.19,158.37 0 top
X54  DIN5PIN  [EDGEDIN]  118.87,158.37 0 top
X55  DIN5PIN  [EDGEDIN]  138.56,158.37 0 top
X56  VERTICAL_3_5MM_SOCKET  [VERTICAL_3_5MM_SOCKET]  20.45,158.37 0 top

## Library data of the parts
A A1-A7 B B1-B7 C C1-C63 D D11 D17 D23 D29 D35 D41 D47 E E1-E7 F F1-F7 R1-R152 = rcl
CK CK1-CK7 GND GND1-GND7 RA1-RA16 = pinhead
CLK CLK1-CLK7 DAT DAT1-DAT7 PWR PWR1-PWR7 = led
D1 D6 D12 D18 D24 D30 D36 D42 IC3 IC8 IC12 IC16 IC20 IC24 IC28 IC32 = jasons_stuff
D2-D5 D7-D10 D13-D16 D19-D22 D25-D28 D31-D34 D37-D40 D43-D46 E$1-E$3 = adafruit
IC1 IC7 IC11 IC15 IC19 IC23 IC27 IC31 = burr-brown; MPN: REG1117; OC_FARNELL: 1097566; OC_NEWARK: 14P6981
IC2 IC5 IC9 IC13 IC17 IC21 IC25 IC29 = 40xx
IC4 IC6 IC10 IC14 IC18 IC22 IC26 IC30 = optocoupler; MF: VISHAY/TELEFUNKEN; MPN: 6N138; OC_FARNELL: 9860150; OC_NEWARK: 35K5294
ICSP ICSP1-ICSP7 = tag-connect
IN IN1-IN7 U$1-U$8 X1-X56 = jason_eagle6

## Nets
CLK: CLK.K R2.2
CLK1: CLK1.K R37.2
CLK2: CLK2.K R56.2
CLK3: CLK3.K R75.2
CLK4: CLK4.K R94.2
CLK5: CLK5.K R113.2
CLK6: CLK6.K R132.2
CLK7: CLK7.K R151.2
CLK_LED: CLK.A IC3.6 ICSP.5
CLK_LED1: CLK1.A IC8.6 ICSP1.5
CLK_LED2: CLK2.A IC12.6 ICSP2.5
CLK_LED3: CLK3.A IC16.6 ICSP3.5
CLK_LED4: CLK4.A IC20.6 ICSP4.5
CLK_LED5: CLK5.A IC24.6 ICSP5.5
CLK_LED6: CLK6.A IC28.6 ICSP6.5
CLK_LED7: CLK7.A IC32.6 ICSP7.5
DAT_LED: DAT.A IC3.7 ICSP.4
DAT_LED1: DAT1.A IC8.7 ICSP1.4
DAT_LED2: DAT2.A IC12.7 ICSP2.4
DAT_LED3: DAT3.A IC16.7 ICSP3.4
DAT_LED4: DAT4.A IC20.7 ICSP4.4
DAT_LED5: DAT5.A IC24.7 ICSP5.4
DAT_LED6: DAT6.A IC28.7 ICSP6.4
DAT_LED7: DAT7.A IC32.7 ICSP7.4
GND: C1.2 C2.2 C3.2 C4.2 C5.- C6.- C7.1 D3.A D5.A F.1 GND.1 IC1.1 IC2.8 IC3.8 IC4.5 ICSP.3 R1.1 R2.1 R3.1 R17.1 X1.2 X2.2 X3.2 X4.2 X5.2 X6.2
GND1: C8.2 C9.2 C10.- C11.- C12.2 C13.2 C14.1 D9.A D10.A F1.1 GND1.1 IC5.8 IC6.5 IC7.1 IC8.8 ICSP1.3 R34.1 R35.1 R36.1 R37.1 X8.2 X9.2 X10.2 X11.2 X12.2 X13.2
GND2: C16.2 C17.2 C18.- C19.- C20.2 C21.2 C22.1 D15.A D16.A F2.1 GND2.1 IC9.8 IC10.5 IC11.1 IC12.8 ICSP2.3 R53.1 R54.1 R55.1 R56.1 X15.2 X16.2 X17.2 X18.2 X19.2 X20.2
GND3: C24.2 C25.2 C26.- C27.- C28.2 C29.2 C30.1 D21.A D22.A F3.1 GND3.1 IC13.8 IC14.5 IC15.1 IC16.8 ICSP3.3 R72.1 R73.1 R74.1 R75.1 X22.2 X23.2 X24.2 X25.2 X26.2 X27.2
GND4: C32.2 C33.2 C34.- C35.- C36.2 C37.2 C38.1 D27.A D28.A F4.1 GND4.1 IC17.8 IC18.5 IC19.1 IC20.8 ICSP4.3 R91.1 R92.1 R93.1 R94.1 X29.2 X30.2 X31.2 X32.2 X33.2 X34.2
GND5: C40.2 C41.2 C42.- C43.- C44.2 C45.2 C46.1 D33.A D34.A F5.1 GND5.1 IC21.8 IC22.5 IC23.1 IC24.8 ICSP5.3 R110.1 R111.1 R112.1 R113.1 X36.2 X37.2 X38.2 X39.2 X40.2 X41.2
GND6: C48.2 C49.2 C50.- C51.- C52.2 C53.2 C54.1 D39.A D40.A F6.1 GND6.1 IC25.8 IC26.5 IC27.1 IC28.8 ICSP6.3 R129.1 R130.1 R131.1 R132.1 X43.2 X44.2 X45.2 X46.2 X47.2 X48.2
GND7: C56.2 C57.2 C58.- C59.- C60.2 C61.2 C62.1 D45.A D46.A F7.1 GND7.1 IC29.8 IC30.5 IC31.1 IC32.8 ICSP7.3 R148.1 R149.1 R150.1 R151.1 X50.2 X51.2 X52.2 X53.2 X54.2 X55.2
MIDI_IN: IC2.3 IC2.5 IC2.7 IC2.9 IC2.11 IC2.14 IC3.2 IC4.6 R18.2
MIDI_IN1: IC5.3 IC5.5 IC5.7 IC5.9 IC5.11 IC5.14 IC6.6 IC8.2 R33.2
MIDI_IN2: IC9.3 IC9.5 IC9.7 IC9.9 IC9.11 IC9.14 IC10.6 IC12.2 R52.2
MIDI_IN3: IC13.3 IC13.5 IC13.7 IC13.9 IC13.11 IC13.14 IC14.6 IC16.2 R71.2
MIDI_IN4: IC17.3 IC17.5 IC17.7 IC17.9 IC17.11 IC17.14 IC18.6 IC20.2 R90.2
MIDI_IN5: IC21.3 IC21.5 IC21.7 IC21.9 IC21.11 IC21.14 IC22.6 IC24.2 R109.2
MIDI_IN6: IC25.3 IC25.5 IC25.7 IC25.9 IC25.11 IC25.14 IC26.6 IC28.2 R128.2
MIDI_IN7: IC29.3 IC29.5 IC29.7 IC29.9 IC29.11 IC29.14 IC30.6 IC32.2 R147.2
MIDI_OUT: IC3.3 R24.1 RA4.1
MIDI_OUT1: IC8.3 R38.1 RA3.1
MIDI_OUT2: IC12.3 R57.1 RA6.1
MIDI_OUT3: IC16.3 R76.1 RA8.1
MIDI_OUT4: IC20.3 R95.1 RA10.1
MIDI_OUT5: IC24.3 R114.1 RA12.1
MIDI_OUT6: IC28.3 R133.1 RA14.1
MIDI_OUT7: IC32.3 R152.1 RA16.1
N$1: R14.2 X1.5
N$2: R12.2 X2.5
N$3: R10.2 X3.5
N$4: R8.2 X4.5
N$5: R6.2 X5.5
N$6: R4.2 X6.5
N$7: IC2.15 R14.1
N$8: IC2.12 R12.1
N$9: IC2.10 R10.1
N$10: IC2.6 R8.1
N$11: IC2.2 R4.1
N$12: IC2.4 R6.1
N$13: PWR.K R1.2
N$14: R15.1 X1.4
N$15: R13.1 X2.4
N$16: R11.1 X3.4
N$17: R9.1 X4.4
N$18: R7.1 X5.4
N$19: R5.1 X6.4
N$20: B.1 C.1 IN.4 R16.1
N$21: D1.A IC4.2 R16.2
N$22: IC4.7 R17.2
N$23: DAT.K R3.2
N$24: A.1 D1.C D.1 IC4.3 IN.5
N$25: IC3.5 RA2.1
N$26: C.2 D.2 X7.3
N$27: D4.A D5.C U$1.BARREL
N$28: D2.A D3.C U$1.PIN
N$29: F.2 X7.2
N$30: A.2 B.2 E.2 X7.4
N$31: C7.2 CK.1 E.1 R24.2
N$32: R19.2 X8.5
N$33: IC3.4 ICSP.1
N$34: R20.2 X9.5
N$35: R23.2 X10.5
N$36: R21.2 X11.5
N$37: R22.2 X12.5
N$38: R25.2 X13.5
N$39: R26.1 X8.4
N$40: R27.1 X9.4
N$41: R28.1 X10.4
N$42: R29.1 X11.4
N$43: R30.1 X12.4
N$44: R31.1 X13.4
N$45: B1.1 C15.1 IN1.4 R32.1
N$46: D6.A IC6.2 R32.2
N$47: IC6.7 R34.2
N$48: A1.1 D6.C D11.1 IC6.3 IN1.5
N$49: DAT1.K R35.2
N$50: D7.A D9.C U$2.BARREL
N$51: D8.A D10.C U$2.PIN
N$52: IC8.4 ICSP1.1
N$53: PWR1.K R36.2
N$54: IC8.5 RA1.1
N$55: IC5.15 R19.1
N$56: IC5.12 R20.1
N$57: IC5.10 R23.1
N$58: IC5.6 R21.1
N$59: IC5.2 R25.1
N$60: IC5.4 R22.1
N$61: C15.2 D11.2 X14.3
N$62: A1.2 B1.2 E1.2 X14.4
N$63: C14.2 CK1.1 E1.1 R38.2
N$64: F1.2 X14.2
N$65: R39.2 X15.5
N$66: R40.2 X16.5
N$67: R43.2 X17.5
N$68: R41.2 X18.5
N$69: R42.2 X19.5
N$70: R44.2 X20.5
N$71: R45.1 X15.4
N$72: R46.1 X16.4
N$73: R47.1 X17.4
N$74: R48.1 X18.4
N$75: R49.1 X19.4
N$76: R50.1 X20.4
N$77: B2.1 C23.1 IN2.4 R51.1
N$78: D12.A IC10.2 R51.2
N$79: IC10.7 R53.2
N$80: A2.1 D12.C D17.1 IC10.3 IN2.5
N$81: DAT2.K R54.2
N$82: D13.A D15.C U$3.BARREL
N$83: D14.A D16.C U$3.PIN
N$84: IC12.4 ICSP2.1
N$85: PWR2.K R55.2
N$86: IC12.5 RA5.1
N$87: IC9.15 R39.1
N$88: IC9.12 R40.1
N$89: IC9.10 R43.1
N$90: IC9.6 R41.1
N$91: IC9.2 R44.1
N$92: IC9.4 R42.1
N$93: C23.2 D17.2 X21.3
N$94: A2.2 B2.2 E2.2 X21.4
N$95: C22.2 CK2.1 E2.1 R57.2
N$96: F2.2 X21.2
N$97: R58.2 X22.5
N$98: R59.2 X23.5
N$99: R62.2 X24.5
N$100: R60.2 X25.5
N$101: R61.2 X26.5
N$102: R63.2 X27.5
N$103: R64.1 X22.4
N$104: R65.1 X23.4
N$105: R66.1 X24.4
N$106: R67.1 X25.4
N$107: R68.1 X26.4
N$108: R69.1 X27.4
N$109: B3.1 C31.1 IN3.4 R70.1
N$110: D18.A IC14.2 R70.2
N$111: IC14.7 R72.2
N$112: A3.1 D18.C D23.1 IC14.3 IN3.5
N$113: DAT3.K R73.2
N$114: D19.A D21.C U$4.BARREL
N$115: D20.A D22.C U$4.PIN
N$116: IC16.4 ICSP3.1
N$117: PWR3.K R74.2
N$118: IC16.5 RA7.1
N$119: IC13.15 R58.1
N$120: IC13.12 R59.1
N$121: IC13.10 R62.1
N$122: IC13.6 R60.1
N$123: IC13.2 R63.1
N$124: IC13.4 R61.1
N$125: C31.2 D23.2 X28.3
N$126: A3.2 B3.2 E3.2 X28.4
N$127: C30.2 CK3.1 E3.1 R76.2
N$128: F3.2 X28.2
N$129: R77.2 X29.5
N$130: R78.2 X30.5
N$131: R81.2 X31.5
N$132: R79.2 X32.5
N$133: R80.2 X33.5
N$134: R82.2 X34.5
N$135: R83.1 X29.4
N$136: R84.1 X30.4
N$137: R85.1 X31.4
N$138: R86.1 X32.4
N$139: R87.1 X33.4
N$140: R88.1 X34.4
N$141: B4.1 C39.1 IN4.4 R89.1
N$142: D24.A IC18.2 R89.2
N$143: IC18.7 R91.2
N$144: A4.1 D24.C D29.1 IC18.3 IN4.5
N$145: DAT4.K R92.2
N$146: D25.A D27.C U$5.BARREL
N$147: D26.A D28.C U$5.PIN
N$148: IC20.4 ICSP4.1
N$149: PWR4.K R93.2
N$150: IC20.5 RA9.1
N$151: IC17.15 R77.1
N$152: IC17.12 R78.1
N$153: IC17.10 R81.1
N$154: IC17.6 R79.1
N$155: IC17.2 R82.1
N$156: IC17.4 R80.1
N$157: C39.2 D29.2 X35.3
N$158: A4.2 B4.2 E4.2 X35.4
N$159: C38.2 CK4.1 E4.1 R95.2
N$160: F4.2 X35.2
N$161: R96.2 X36.5
N$162: R97.2 X37.5
N$163: R100.2 X38.5
N$164: R98.2 X39.5
N$165: R99.2 X40.5
N$166: R101.2 X41.5
N$167: R102.1 X36.4
N$168: R103.1 X37.4
N$169: R104.1 X38.4
N$170: R105.1 X39.4
N$171: R106.1 X40.4
N$172: R107.1 X41.4
N$173: B5.1 C47.1 IN5.4 R108.1
N$174: D30.A IC22.2 R108.2
N$175: IC22.7 R110.2
N$176: A5.1 D30.C D35.1 IC22.3 IN5.5
N$177: DAT5.K R111.2
N$178: D31.A D33.C U$6.BARREL
N$179: D32.A D34.C U$6.PIN
N$180: IC24.4 ICSP5.1
N$181: PWR5.K R112.2
N$182: IC24.5 RA11.1
N$183: IC21.15 R96.1
N$184: IC21.12 R97.1
N$185: IC21.10 R100.1
N$186: IC21.6 R98.1
N$187: IC21.2 R101.1
N$188: IC21.4 R99.1
N$189: C47.2 D35.2 X42.3
N$190: A5.2 B5.2 E5.2 X42.4
N$191: C46.2 CK5.1 E5.1 R114.2
N$192: F5.2 X42.2
N$193: R115.2 X43.5
N$194: R116.2 X44.5
N$195: R119.2 X45.5
N$196: R117.2 X46.5
N$197: R118.2 X47.5
N$198: R120.2 X48.5
N$199: R121.1 X43.4
N$200: R122.1 X44.4
N$201: R123.1 X45.4
N$202: R124.1 X46.4
N$203: R125.1 X47.4
N$204: R126.1 X48.4
N$205: B6.1 C55.1 IN6.4 R127.1
N$206: D36.A IC26.2 R127.2
N$207: IC26.7 R129.2
N$208: A6.1 D36.C D41.1 IC26.3 IN6.5
N$209: DAT6.K R130.2
N$210: D37.A D39.C U$7.BARREL
N$211: D38.A D40.C U$7.PIN
N$212: IC28.4 ICSP6.1
N$213: PWR6.K R131.2
N$214: IC28.5 RA13.1
N$215: IC25.15 R115.1
N$216: IC25.12 R116.1
N$217: IC25.10 R119.1
N$218: IC25.6 R117.1
N$219: IC25.2 R120.1
N$220: IC25.4 R118.1
N$221: C55.2 D41.2 X49.3
N$222: A6.2 B6.2 E6.2 X49.4
N$223: C54.2 CK6.1 E6.1 R133.2
N$224: F6.2 X49.2
N$225: R134.2 X50.5
N$226: R135.2 X51.5
N$227: R138.2 X52.5
N$228: R136.2 X53.5
N$229: R137.2 X54.5
N$230: R139.2 X55.5
N$231: R140.1 X50.4
N$232: R141.1 X51.4
N$233: R142.1 X52.4
N$234: R143.1 X53.4
N$235: R144.1 X54.4
N$236: R145.1 X55.4
N$237: B7.1 C63.1 IN7.4 R146.1
N$238: D42.A IC30.2 R146.2
N$239: IC30.7 R148.2
N$240: A7.1 D42.C D47.1 IC30.3 IN7.5
N$241: DAT7.K R149.2
N$242: D43.A D45.C U$8.BARREL
N$243: D44.A D46.C U$8.PIN
N$244: IC32.4 ICSP7.1
N$245: PWR7.K R150.2
N$246: IC32.5 RA15.1
N$247: IC29.15 R134.1
N$248: IC29.12 R135.1
N$249: IC29.10 R138.1
N$250: IC29.6 R136.1
N$251: IC29.2 R139.1
N$252: IC29.4 R137.1
N$253: C63.2 D47.2 X56.3
N$254: A7.2 B7.2 E7.2 X56.4
N$255: C62.2 CK7.1 E7.1 R152.2
N$256: F7.2 X56.2
VCC: C2.1 C3.1 C4.1 C5.+ IC1.2 IC2.1 IC3.1 IC4.8 ICSP.2 PWR.A R5.2 R7.2 R9.2 R11.2 R13.2 R15.2 R18.1
VCC1: C9.1 C11.+ C12.1 C13.1 IC5.1 IC6.8 IC7.2 IC8.1 ICSP1.2 PWR1.A R26.2 R27.2 R28.2 R29.2 R30.2 R31.2 R33.1
VCC2: C17.1 C19.+ C20.1 C21.1 IC9.1 IC10.8 IC11.2 IC12.1 ICSP2.2 PWR2.A R45.2 R46.2 R47.2 R48.2 R49.2 R50.2 R52.1
VCC3: C25.1 C27.+ C28.1 C29.1 IC13.1 IC14.8 IC15.2 IC16.1 ICSP3.2 PWR3.A R64.2 R65.2 R66.2 R67.2 R68.2 R69.2 R71.1
VCC4: C33.1 C35.+ C36.1 C37.1 IC17.1 IC18.8 IC19.2 IC20.1 ICSP4.2 PWR4.A R83.2 R84.2 R85.2 R86.2 R87.2 R88.2 R90.1
VCC5: C41.1 C43.+ C44.1 C45.1 IC21.1 IC22.8 IC23.2 IC24.1 ICSP5.2 PWR5.A R102.2 R103.2 R104.2 R105.2 R106.2 R107.2 R109.1
VCC6: C49.1 C51.+ C52.1 C53.1 IC25.1 IC26.8 IC27.2 IC28.1 ICSP6.2 PWR6.A R121.2 R122.2 R123.2 R124.2 R125.2 R126.2 R128.1
VCC7: C57.1 C59.+ C60.1 C61.1 IC29.1 IC30.8 IC31.2 IC32.1 ICSP7.2 PWR7.A R140.2 R141.2 R142.2 R143.2 R144.2 R145.2 R147.1
VIN: C1.1 C6.+ D2.C D4.C IC1.3
VIN1: C8.1 C10.+ D7.C D8.C IC7.3
VIN2: C16.1 C18.+ D13.C D14.C IC11.3
VIN3: C24.1 C26.+ D19.C D20.C IC15.3
VIN4: C32.1 C34.+ D25.C D26.C IC19.3
VIN5: C40.1 C42.+ D31.C D32.C IC23.3
VIN6: C48.1 C50.+ D37.C D38.C IC27.3
VIN7: C56.1 C58.+ D43.C D44.C IC31.3